# Altium PCB UDFN18_L5.5-W1.5-P0.50-BL_2026-06-13.pcbdoc
Units mm, origin at the board's own origin, x right, y up, seen from the top; angles counter-clockwise.
Board outline 34.45 x 27.95 mm, 2 copper layers (Top Layer, Bottom Layer); 1 components, 0 nets, 21 pads, 0 vias.
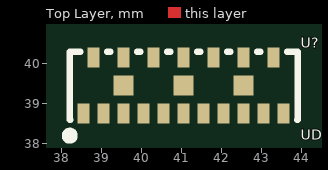
[diagram p0: Top Layer view]
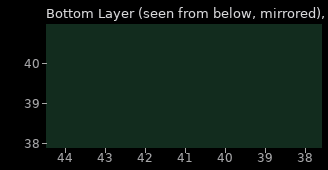
[diagram p1: Bottom Layer view, seen from below]

## Layer stack, top to bottom
Top Layer: signal copper (thickness not stored)
Dielectric: dielectric 0.32, FR-4, Dk 4.8
Bottom Layer: signal copper (thickness not stored)

## Board outline
59.851,25.4 25.4,25.4 25.4,53.354 59.851,53.354

## Components (designator, comment, footprint, x,y, rotation, side; value= is the part's Value field where it differs from the comment)
U? "UDFN18_L5.5-W1.5-P0.50-BL" UDFN18_L5.5-W1.5-P0.50-BL 41.038,39.25 r0 top

## Footprints (in the part's own frame and the unit in brackets; to place one, negate y for a bottom-side part, rotate by r counter-clockwise, add the part's x,y. Pads: shape width x height; smd on the part's side, far side on the other; paste and mask are expansions set on the pad)
UDFN18_L5.5-W1.5-P0.50-BL [mm]
  rect 0.3x0.5 smd paste+0 mask+0.051: 1(-2.488,-0.5) 2(-1.988,-0.5) 3(-1.488,-0.5) 4(-0.988,-0.5) 5(-0.488,-0.5) 6(0.012,-0.5) 7(0.512,-0.5) 8(1.012,-0.5) 9(1.512,-0.5) 10(2.012,-0.5) 11(2.512,-0.5) 12(2.262,0.9) 13(1.512,0.9) 14(0.762,0.9) 15(0.012,0.9) 16(-0.738,0.9) 17(-1.488,0.9) 18(-2.238,0.9)
  rect 0.5x0.5 smd paste+0 mask+0.051: 19(-1.488,0.2) 20(0.012,0.2) 21(1.512,0.2)
  silkscreen extent -2.94,-1.15 2.86,1.05

## Nets (pads, with @x,y where several pads share a name; then routed paths per layer and width w, separated by ;. In a path a pad name is that pad's centre, name@x,y a point inside that pad or via, vN(x,y) a via of type N, cw(c..) or ccw(c..) an arc to the next point about the centre after c; other vN are vias at no path point)
pads on no net: U?.1 U?.2 U?.3 U?.4 U?.5 U?.6 U?.7 U?.8 U?.9 U?.10 U?.11 U?.12 U?.13 U?.14 U?.15 U?.16 U?.17 U?.18 U?.19 U?.20 U?.21